# EAGLE board stm32hw01 (EAGLE 6.6.0)

Size 160 x 100 mm. Coordinates in mm from the lower left corner, seen from the top.
Outline: 0,0 160,0 160,100 0,100 0,0
Copper layers (1*16): Top 0.035mm / dielectric 1.5mm / Bottom 0.035mm
Design rules "default": minimum track width 10mil, minimum drill 24mil, track to track 8mil, track to pad 8mil, pad to pad 8mil, via to via 8mil, smd to smd 8mil, copper to edge 40mil, drill to drill 8mil, minimum pad ring 10mil, minimum via ring 8mil, stop-mask expansion 4mil, vias tented up to drill 0mil, thermal gap 10mil
Net classes: 0 default: width 0.203 mm, drill 0.6 mm, clearance 0.203 mm; 1 power: width 0.381 mm, drill 0.6 mm, clearance 0.254 mm; 2 gnd: width 0.254 mm, drill 0.6 mm, clearance 0.254 mm

## Footprints (pad centres in the part's own frame; a part is rotated, then mirrored left to right if it is on the bottom)
SJ_2S-NO = smd 0.635 x 1.27: 1 -0.45,0; 2 0.45,0
CRYSTAL-SMD-5X3 = smd 1.9 x 1.1: 1 -1.85,-1.15; 2 1.85,-1.15; 3 1.85,1.15; 4 -1.85,1.15
1X02 = drill 1.016 pad 1.88: 1 0,0; 2 2.54,0
C0603 = smd 1.1 x 1: 1 -0.85,0; 2 0.85,0
CR1220SMD = smd 3.54 x 2.6: P+ 8.3,0; P- -7.55,0 | hole 1: -3.5,0 | hole 1.3: 4,0
MA06-1 = drill 1.016 long: 1 0,0; 2 2.54,0; 3 5.08,0; 4 7.62,0; 5 10.16,0; 6 12.7,0
SOT-223 = smd 1 x 2.1: 1 -2.3,-3.1; 2 0,-3.1; 3 2.3,-3.1 | smd 3.7 x 2.1: 4 0,3.1
R0603 = smd 1 x 1.1: 1 -0.85,0; 2 0.85,0
FE05-1 = drill 0.813 long: 1 -5.08,0; 2 -2.54,0; 3 0,0; 4 2.54,0; 5 5.08,0
LQFP64-10X10MM = smd 1.194 x 0.305: 1 -5.75,3.75; 2 -5.75,3.25; 3 -5.75,2.75; 4 -5.75,2.25; 5 -5.75,1.75; 6 -5.75,1.25; 7 -5.75,0.75; 8 -5.75,0.25; 9 -5.75,-0.25; 10 -5.75,-0.75; 11 -5.75,-1.25; 12 -5.75,-1.75; 13 -5.75,-2.25; 14 -5.75,-2.75; 15 -5.75,-3.25; 16 -5.75,-3.75; 33 5.75,-3.75; 34 5.75,-3.25; 35 5.75,-2.75; 36 5.75,-2.25; 37 5.75,-1.75; 38 5.75,-1.25; 39 5.75,-0.75; 40 5.75,-0.25; 41 5.75,0.25; 42 5.75,0.75; 43 5.75,1.25; 44 5.75,1.75; 45 5.75,2.25; 46 5.75,2.75; 47 5.75,3.25; 48 5.75,3.75 | smd 0.305 x 1.194: 17 -3.75,-5.75; 18 -3.25,-5.75; 19 -2.75,-5.75; 20 -2.25,-5.75; 21 -1.75,-5.75; 22 -1.25,-5.75; 23 -0.75,-5.75; 24 -0.25,-5.75; 25 0.25,-5.75; 26 0.75,-5.75; 27 1.25,-5.75; 28 1.75,-5.75; 29 2.25,-5.75; 30 2.75,-5.75; 31 3.25,-5.75; 32 3.75,-5.75; 49 3.75,5.75; 50 3.25,5.75; 51 2.75,5.75; 52 2.25,5.75; 53 1.75,5.75; 54 1.25,5.75; 55 0.75,5.75; 56 0.25,5.75; 57 -0.25,5.75; 58 -0.75,5.75; 59 -1.25,5.75; 60 -1.75,5.75; 61 -2.25,5.75; 62 -2.75,5.75; 63 -3.25,5.75; 64 -3.75,5.75
USB-MINIB-CISECO = smd 3.8 x 0.5: D+ 7.9,0; D- 7.9,0.8; GND 7.9,-1.6; ID 7.9,-0.8; VBUS 7.9,1.6 | smd 2.5 x 2: MTN1 2.25,4.45; MTN2 7.75,4.45; MTN3 2.25,-4.45; MTN4 7.75,-4.45 | hole 0.9: 5.2,2.2; 5.2,-2.2

## Placement (x,y rotation side)
3V3  SOLDERJUMPERNO  [SJ_2S-NO]  31.11,33.02 180 top
8MHZ  8MHz  [CRYSTAL-SMD-5X3]  34.29,45.72 180 top
BATTERY  SOLDERJUMPERNO  [SJ_2S-NO]  28.57,33.02 180 top
BOOT0  [1X02]  45.09,61.28 180 top
C1  22p  [C0603]  35.56,49.53 180 top
C2  22p  [C0603]  29.21,45.72 270 top
C3  4.7uF  [C0603]  17.78,40.32 180 top
C4  1uF  [C0603]  21.59,40.32 180 top
C5  100nF  [C0603]  43.18,52.07 180 top
C6  100nF  [C0603]  43.18,34.29 0 top
C7  100nF  [C0603]  50.8,34.29 0 top
C8  100nF  [C0603]  55.88,46.99 90 top
C9  100nF  [C0603]  38.1,40.64 270 top
C10  100nF  [C0603]  70.48,41.27 90 top
CR1220  CR1220SMD  [CR1220SMD]  28.89,23.5 0 top
GND  UART  [MA06-1]  75.56,33.66 180 top
MCP1825  MCP1825SOT-223-3  [SOT-223]  19.05,47.94 0 top
R1  10k  [R0603]  70.48,49.21 270 top
R2  10k  [R0603]  47.94,61.28 270 top
R3  22r  [R0603]  69.53,13.02 270 top
R4  22r  [R0603]  71.75,13.02 270 top
R5  100k  [R0603]  75.25,13.02 180 top
R6  1k5  [R0603]  66.36,13.02 180 top
ST-LINK  [FE05-1]  75.25,45.09 270 top
U1  STM32F303_334RXT  [LQFP64-10X10MM]  46.99,43.18 0 top
U$10  USB-MINIB-5PIN  [USB-MINIB-CISECO]  70.8,0.32 90 top

## Library data of the parts
3V3 8MHZ BATTERY BOOT0 = SparkFun
C1-C10 R1-R6 = resistor
CR1220 = IotaWatt_parts; MPN: Harwin S8411-45R
GND = JeeLabs
MCP1825 = SteelCaveRobotics-Power
ST-LINK = con-lsta; OC_FARNELL: unknown; OC_NEWARK: unknown
U1 = stm32f303; MANUFACTURER_PART_NUMBER: stm32f303_334rxt; VENDOR: STMicroelectronics
U$10 = Ciseco USB miniB_Updated

## Nets
+3V3: 3V3.1 BOOT0.2 C4.2 C5.2 C6.2 C7.2 C8.2 C9.2 MCP1825.3 R1.1 R6.2 ST-LINK.1 U1.13 U1.19 U1.32 U1.48 U1.64
+5V: C3.2 GND.3 MCP1825.1 U$10.VBUS
BOOT0: BOOT0.1 R2.1 U1.60
GND: C1.2 C2.2 C3.1 C4.1 C5.1 C6.1 C7.1 C8.1 C9.1 C10.1 CR1220.P- GND.1 MCP1825.2 R2.2 R5.1 ST-LINK.3 U1.12 U1.18 U1.31 U1.47 U1.63 U$10.GND U$10.MTN1 U$10.MTN2 U$10.MTN3 U$10.MTN4
N$1: BATTERY.2 CR1220.P+
N$3: R5.2 U$10.ID
N$6: R4.2 R6.1 U$10.D+
N$7: R3.2 U$10.D-
NRST: C10.2 R1.2 ST-LINK.5 U1.7
OSC_IN: 8MHZ.1 C1.1 U1.5
OSC_OUT: 8MHZ.3 C2.1 U1.6
PA9/TX: GND.5 U1.42
PA10/RX: GND.4 U1.43
SWCLK: ST-LINK.2 U1.49
SWDIO: ST-LINK.4 U1.46
USB_DM: R3.1 U1.44
USB_DP: R4.1 U1.45
VBAT: 3V3.2 BATTERY.1 U1.1

## Tracks (layer width: path | path; a pad name or v marks a point on that pad's centre or on a via)
+3V3  (16 unrouted)
+5V  (3 unrouted)
BOOT0  (2 unrouted)
GND  (25 unrouted)
N$1  (1 unrouted)
N$3  (1 unrouted)
N$6  (2 unrouted)
N$7  (1 unrouted)
NRST  (3 unrouted)
OSC_IN  (2 unrouted)
OSC_OUT  (2 unrouted)
PA9/TX  (1 unrouted)
PA10/RX  (1 unrouted)
SWCLK  (1 unrouted)
SWDIO  (1 unrouted)
USB_DM  (1 unrouted)
USB_DP  (1 unrouted)
VBAT  (2 unrouted)